# EAGLE board Schematic copy (EAGLE 7.1.0)
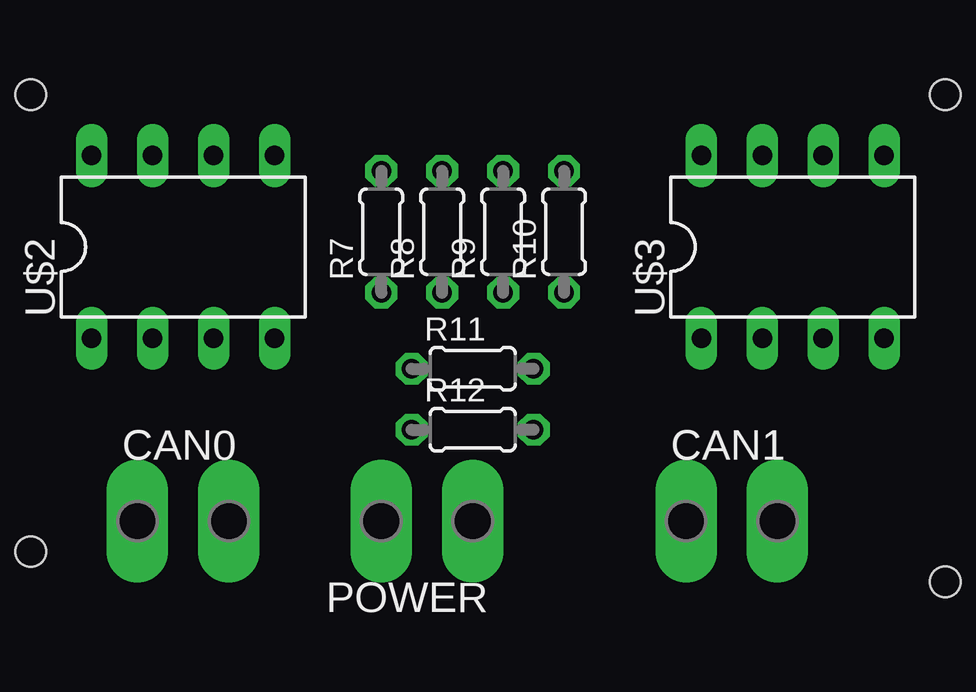
[diagram p0: board, top side]
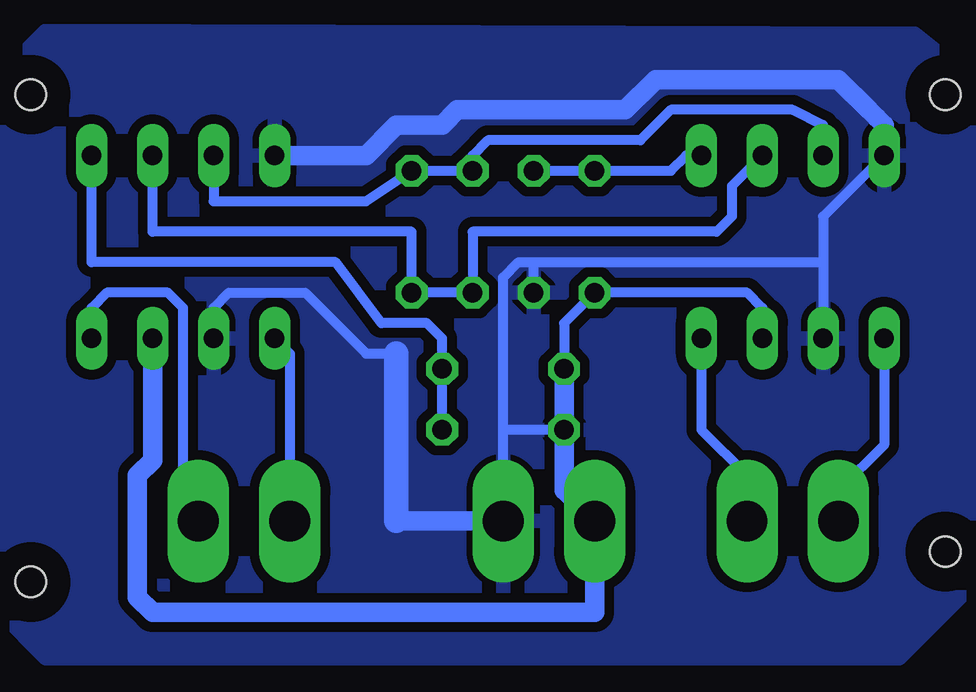
[diagram p1: board, bottom side, seen from below]

No outline drawn. Coordinates in mm, seen from the top.
Copper layers (1*16): Top 0.035mm / dielectric 1.5mm / Bottom 0.035mm
Design rules "default": minimum track width 10mil, minimum drill 24mil, track to track 8mil, track to pad 8mil, pad to pad 8mil, via to via 8mil, smd to smd 8mil, copper to edge 40mil, drill to drill 8mil, minimum pad ring 10mil, minimum via ring 8mil, stop-mask expansion 4mil, vias tented up to drill 0mil, thermal gap 10mil
Holes 1.27 mm at 43.18,3.81 43.18,22.86 81.28,22.86 81.28,2.54

## Footprints (pad centres in the part's own frame; a part is rotated, then mirrored left to right if it is on the bottom)
P2-38-17 = drill 1.702 pad 2.121 long: TP-1 -1.905,0; TP-2 1.905,0
0204/5 = drill 0.813 octagon: 1 -2.54,0; 2 2.54,0
DIL08 = drill 0.813 long: 1 -3.81,-3.81; 2 -1.27,-3.81; 3 1.27,-3.81; 4 3.81,-3.81; 5 3.81,3.81; 6 1.27,3.81; 7 -1.27,3.81; 8 -3.81,3.81

## Placement (x,y rotation side)
CAN0  PTR2  [P2-38-17]  49.53,5.08 0 top
CAN1  PTR2  [P2-38-17]  72.39,5.08 0 top
POWER  PTR2  [P2-38-17]  59.69,5.08 180 top
R7  [0204/5]  57.78,17.14 90 top
R8  [0204/5]  60.33,17.14 90 top
R9  [0204/5]  62.87,17.14 90 top
R10  [0204/5]  65.41,17.14 90 top
R11  [0204/5]  61.59,11.43 0 top
R12  [0204/5]  61.59,8.89 0 top
U$2  MCP2551-DIP  [DIL08]  49.53,16.51 0 top
U$3  MCP2551-DIP  [DIL08]  74.93,16.51 0 top

## Library data of the parts
CAN0 CAN1 POWER = testpad
R7-R12 = resistor
U$2 U$3 = Dash parts

## Nets
CH: R9.2 R10.2 U$2.7 U$3.7
CL: R9.1 R10.1 U$2.6 U$3.6
GND: POWER.TP-1 R8.1 R12.1 U$2.2 U$2.8 U$3.2 U$3.8
N$3: R7.2 R8.2 U$2.5
N$7: R11.2 R12.2 U$3.5
RX1: CAN0.TP-2 U$2.4
RX2: CAN1.TP-2 U$3.4
TX1: CAN0.TP-1 U$2.1
TX2: CAN1.TP-1 U$3.1
VCC: POWER.TP-2 R7.1 R11.1 U$2.3 U$3.3

## Tracks (layer width: path | path; a pad name or v marks a point on that pad's centre or on a via)
CH
  Bottom 0.406: U$3.7 73.66,18.41 67.31,18.41 R10.2 R9.2 62.87,20.32 62.23,20.95 55.88,20.95 54.61,22.23 49.53,22.23 48.26,21.59 U$2.7
CL
  Bottom 0.406: U$2.6 52.07,19.05 52.07,17.78 52.7,17.14 62.87,17.14 R9.1 R10.1 65.41,17.14 76.2,17.14 U$3.6
GND
  Bottom 0.406: U$2.8 48.26,17.78 48.26,15.88 | 48.26,15.88 U$2.2 | POWER.TP-1 61.59,8.89 | 61.59,8.89 61.59,15.24 60.96,15.88 60.33,15.88 | 60.33,15.88 48.26,15.88 | R12.1 61.59,8.89 | R8.1 60.33,15.88 | U$3.2 73.66,13.97 73.03,14.61 69.85,14.61 67.31,12.06 66.04,12.06
  Bottom 0.813: 66.04,5.08 POWER.TP-1 | U$2.8 45.72,21.59 46.04,21.91 46.35,22.23 47.62,23.5 55.24,23.5 56.52,22.23 63.5,22.23 64.14,21.59 66.04,21.59 67.31,20.32 U$3.8
  Bottom 1.016: 66.04,12.06 66.04,5.08
  pour Bottom (isolate 0.406): 80.64,25.53 84.45,21.72 84.45,3.17 80.64,-0.64 45.09,-0.64 41.27,3.17 41.27,22.86 44.45,25.4
N$3
  Bottom 0.406: R8.2 R7.2 54.61,19.68 53.98,20.32 U$2.5
N$7
  Bottom 0.406: U$3.5 78.74,15.88 68.58,15.88 66.67,13.34 64.77,13.34 64.14,12.7 R11.2 R12.2
RX1
  Bottom 0.406: U$2.4 53.34,8.89 51.44,6.99 CAN0.TP-2
RX2
  Bottom 0.406: CAN1.TP-2 74.93,5.71 74.93,13.97 75.56,14.61 78.11,14.61 78.74,13.97 U$3.4
TX1
  Bottom 0.406: U$2.1 45.72,8.26 47.62,6.35 CAN0.TP-1
TX2
  Bottom 0.406: U$3.1 70.48,12.06 CAN1.TP-1
VCC
  Bottom 0.406: U$2.3 50.8,13.97 51.44,14.61 R7.1 59.05,13.34 R11.1
  Bottom 0.813: U$3.3 76.2,7.62 76.83,6.99 76.83,1.91 76.2,1.27 57.78,1.27 POWER.TP-2 59.05,6.35 R11.1